# EAGLE board sunalarm (EAGLE 8.4.3)
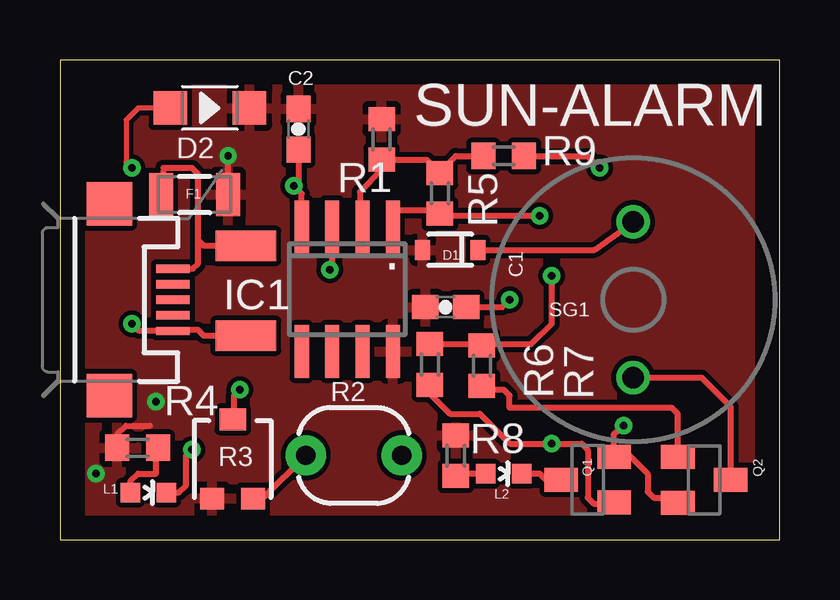
[diagram p0: board, top side]
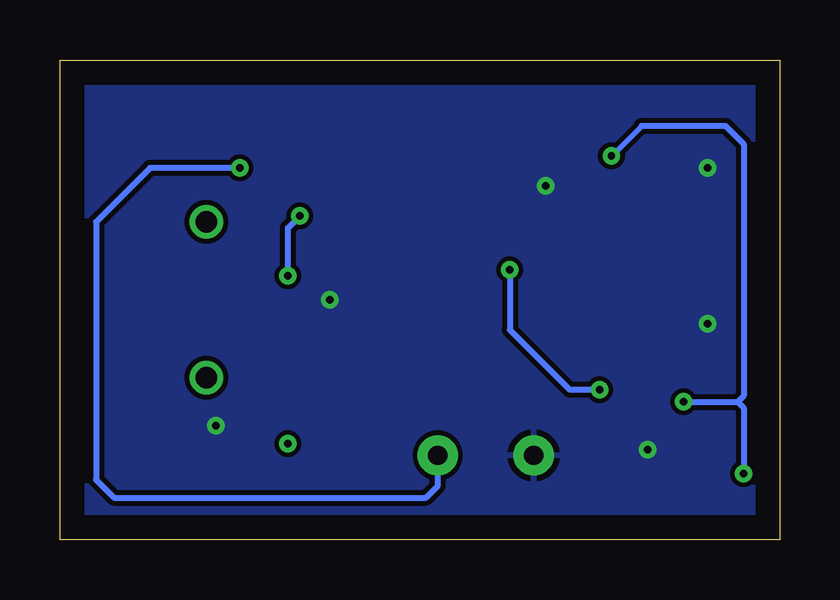
[diagram p1: board, bottom side, seen from below]

Size 30 x 20 mm. Coordinates in mm from the lower left corner, seen from the top.
Outline: 0,0 30,0 30,20 0,20 0,0
Copper layers (1*16): Top 0.035mm / dielectric 1.5mm / Bottom 0.035mm
Design rules "default *": minimum track width 10mil, minimum drill 24mil, track to track 8mil, track to pad 8mil, pad to pad 8mil, via to via 8mil, smd to smd 8mil, copper to edge 40mil, drill to drill 8mil, minimum pad ring 10mil, minimum via ring 8mil, stop-mask expansion 4mil, vias tented up to drill 13mil, thermal gap 10mil

## Footprints (pad centres in the part's own frame; a part is rotated, then mirrored left to right if it is on the bottom)
0603-CAP = smd 1.1 x 1: 1 -0.85,0; 2 0.85,0
SOD-323 = smd 0.63 x 0.83: 1 -1.15,0; 2 1.15,0
SOD-123 = smd 1.397 x 1.397: + -1.651,0; - 1.651,0
PTC-1206 = smd 1 x 1.8: 1 -1.4,0; 2 1.4,0
SO08 = smd 0.6 x 2.2: 1 -1.905,-2.6; 2 -0.635,-2.6; 3 0.635,-2.6; 4 1.905,-2.6; 5 1.905,2.6; 6 0.635,2.6; 7 -0.635,2.6; 8 -1.905,2.6
LED-0603 = smd 0.8 x 0.8: A 0,-0.75; C 0,0.75
SMD1,27-2,54 = smd 1.27 x 2.54: 1 0,0
SOT23 = smd 1 x 1.4: 1 -0.95,-1.1; 2 0.95,-1.1; 3 0,1.1
R0603 = smd 1 x 1.1: 1 -0.85,0; 2 0.85,0
PHOTOCELL = drill 0.8 pad 1.676: 1 -2,0; 2 2,0
TRIMPOT-3MM = smd 1 x 0.9: 1 -0.85,-1.65; 3 0.85,-1.65 | smd 1.1 x 0.9: 2 0,1.65
BUZZER-12MM-NS = drill 0.9: + 3.25,0; - -3.25,0
USB-MICROB = smd 0.35 x 1.4: D+ 0,2.65; D- -0.65,2.65; GND 1.3,2.65; ID 0.65,2.65; VBUS -1.3,2.65 | smd 1.8 x 1.9: MT1 -4,0; MT2 4,0

## Placement (x,y rotation side)
C1  100nF  [0603-CAP]  16.08,9.69 0 top
C2  10nF  [0603-CAP]  9.94,17.11 270 top
D1  [SOD-323]  16.27,12.08 180 top
D2  51V-500MW  [SOD-123]  6.25,18 0 top
F1  PTCSMD  [PTC-1206]  5.61,14.39 180 top
IC1  LM358D  [SO08]  11.98,10.44 180 top
L1  [LED-0603]  3.69,1.96 270 top
L2  [LED-0603]  18.5,2.75 270 top
PAD1  WIREPADSMD1,27-254  [SMD1,27-2,54]  7.75,8.5 90 top
PAD2  WIREPADSMD1,27-254  [SMD1,27-2,54]  7.75,12.25 90 top
Q1  [SOT23]  22,2.5 90 top
Q2  [SOT23]  26.86,2.49 270 top
R1  10K  [R0603]  13.41,16.69 90 top
R2  PHOTOCELLPTH  [PHOTOCELL]  12.25,3.51 0 top
R3  10k  [TRIMPOT-3MM]  7.2,3.36 0 top
R4  1K  [R0603]  3.24,3.83 180 top
R5  1M  [R0603]  15.84,14.44 270 top
R6  200K  [R0603]  15.42,7.3 270 top
R7  20K  [R0603]  17.59,7.25 270 top
R8  1K  [R0603]  16.5,3.5 90 top
R9  3.3K  [R0603]  18.5,16 180 top
SG1  BUZZERNS  [BUZZER-12MM-NS]  23.9,10 90 top
X1  USB-MICROB  [USB-MICROB]  2.06,10 270 top

## Library data of the parts
C1 C2 D1 F1 L1 L2 Q1 Q2 R2 SG1 X1 = SparkFun
D2 = Seeed-OPL-Diode; MPN: MMSZ4689-V-GS08
IC1 = linear
PAD1 PAD2 = wirepad_ext
R1 R4-R9 = rcl
R3 = SparkFun-Electromechanical; PROD_ID: RES-09285

## Nets
GND: C1.2 C2.2 D2.+ IC1.4 L1.C PAD1.1 Q1.2 Q2.2 R2.1 R3.3 X1.GND
N$1: IC1.1 R5.2 R6.1 R7.1
N$2: Q2.1 R7.2
N$3: F1.2 PAD2.1 X1.VBUS
N$4: Q2.3 SG1.-
N$5: L1.A R4.1
N$6: R2.2 R9.1
N$7: IC1.3 R3.2
N$8: IC1.2 R1.1 R5.1 R9.2
N$9: D1.1 SG1.+
N$10: Q1.1 R6.2
N$11: L2.C Q1.3
N$12: L2.A R8.1
VCC: C1.1 C2.1 D1.2 D2.- F1.1 IC1.8 R1.2 R3.1 R4.2 R8.2

## Tracks (layer width: path | path; a pad name or v marks a point on that pad's centre or on a via)
GND  (via drill 0.3)
  Top 0.203: D2.+ 3.25,18 2.75,17.5 2.75,15.75 v3,15.5
  Top 0.254: R3.3 8.45,1.71 R2.1 | IC1.4 10.07,14.43 v9.75,14.75 9.94,14.81 C2.2 | Q2.2 25.72,1.75 24.75,1.75 24.5,2 24.5,2.75 23.55,3.7 Q1.2 23.1,4.4 v23.5,4.75 | PAD1.1 6,8.5 5.75,8.75 4.76,8.75 X1.GND 3.3,8.7 v3,9 | L1.C 4.96,1.96 5.25,2.25 5.25,3.5 v5.5,3.75 | C1.2 18.44,9.69 v18.75,10
  pour Bottom: -0.5,20.75 30.75,20.75 30.75,-1 -0.5,-1
N$1  (via drill 0.3)
  Top 0.254: R7.1 17.54,8.15 R6.1 19.65,8.15 20.5,9 v20.5,11 | 13.75,12.9 IC1.1 14,13.15 14,13.75 15.68,13.75 R5.2 | R5.2 15.66,13.59 | v20,13.5 15.93,13.5 R5.2
  Bottom 0.254: v20.5,11 20.5,13 v20,13.5
N$2
  Top 0.254: Q2.1 25.76,5.24 25.5,5.5 18.74,5.5 18.74,6.01 18.5,6.25 17.74,6.25 R7.2
N$3
  Top 0.254: 5.75,12.5 5.75,15.25 5.5,15.5 4.32,15.5 F1.2 | PAD2.1 6,12.25 5.75,12.5 | X1.VBUS 5.55,11.3 5.75,11.5 5.75,12.5
N$4
  Top 0.254: Q2.3 27.96,5.54 26.75,6.75 SG1.-
N$5
  Top 0.254: R4.1 4,3.74 4,2.75 3.25,2.75 2.94,2.44 L1.A
N$6  (via drill 0.3)
  Top 0.254: R9.1 22,16 v22.5,15.5
  Bottom 0.254: v22.5,15.5 26.25,15.5 28.5,13.25 28.5,2.5 27.75,1.75 14.75,1.75 14.25,2.25 R2.2
N$7  (via drill 0.3)
  Top 0.254: R3.2 7.25,5.06 7.25,6 v7.5,6.25 | IC1.3 11.35,11.35 v11.25,11.25
  Bottom 0.254: v7.5,6.25 8.75,6.25 11.25,8.75 v11.25,11.25
N$8
  Top 0.254: IC1.2 12.5,13.15 12.5,14.5 13.41,15.41 R1.1 15.29,15.84 R5.1 15.84,15.34 16.5,16 R9.2
N$9
  Top 0.254: D1.1 22.28,12.08 SG1.+
N$10  (via drill 0.3)
  Top 0.254: R6.2 15.42,6.08 16.25,5.25 17.5,5.25 18.75,4 v20.5,4 21.75,4 22,3.75 22,1.75 22.25,1.5 23.05,1.5 Q1.1
N$11
  Top 0.254: Q1.3 20.25,2.5 20,2.75 L2.C
N$12
  Top 0.254: L2.A 16.6,2.75 R8.1
VCC  (via drill 0.3)
  Top 0.254: F1.1 v7.01,16 | 3.75,4.75 2.75,4.75 2.39,4.39 R4.2 2.25,3.69
  Bottom 0.203: 5.75,17.25 v7,16 v7.01,16
  Bottom 0.254: 5.75,17.25 2.25,17.25 1.5,16.5 1.5,6 1.75,5.75 | v4,5.75 1.75,5.75 | 1.75,5.75 1.5,5.5 v1.5,2.75
  pour Top: -1,21 30.75,21 30.75,-1.75 -1,-1.75

## Text on the board
tPlace: SUN-ALARM | .